# Altium PCB as5311_tsb.PcbDoc
Units mm, origin at the board's own origin, x right, y up, seen from the top; angles counter-clockwise.
Board outline 12 x 16 mm, 2 copper layers (Top Layer, Bottom Layer), stack 1.569 mm thick; 6 components, 12 nets, 45 pads, 24 vias.
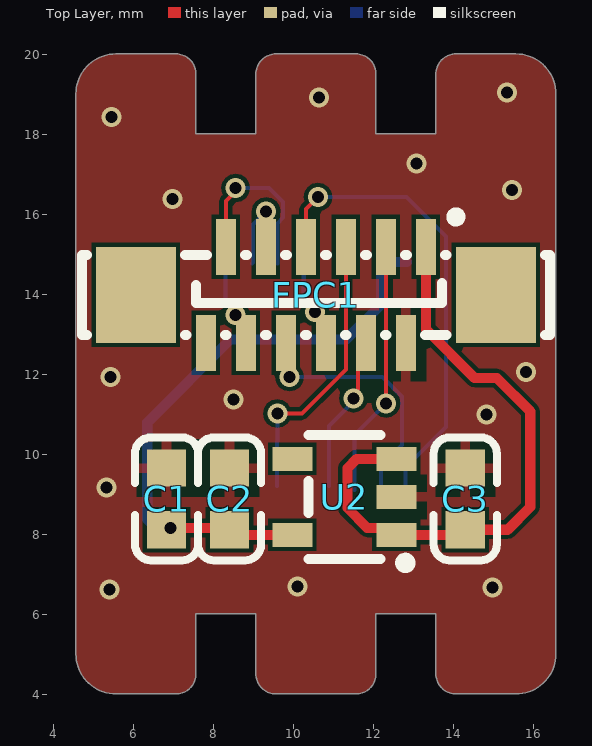
[diagram p0: Top Layer view]
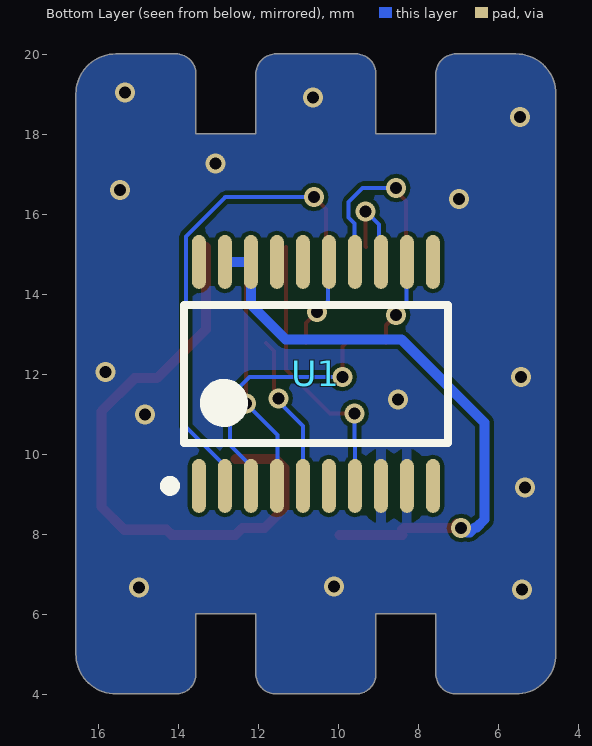
[diagram p1: Bottom Layer view, seen from below]
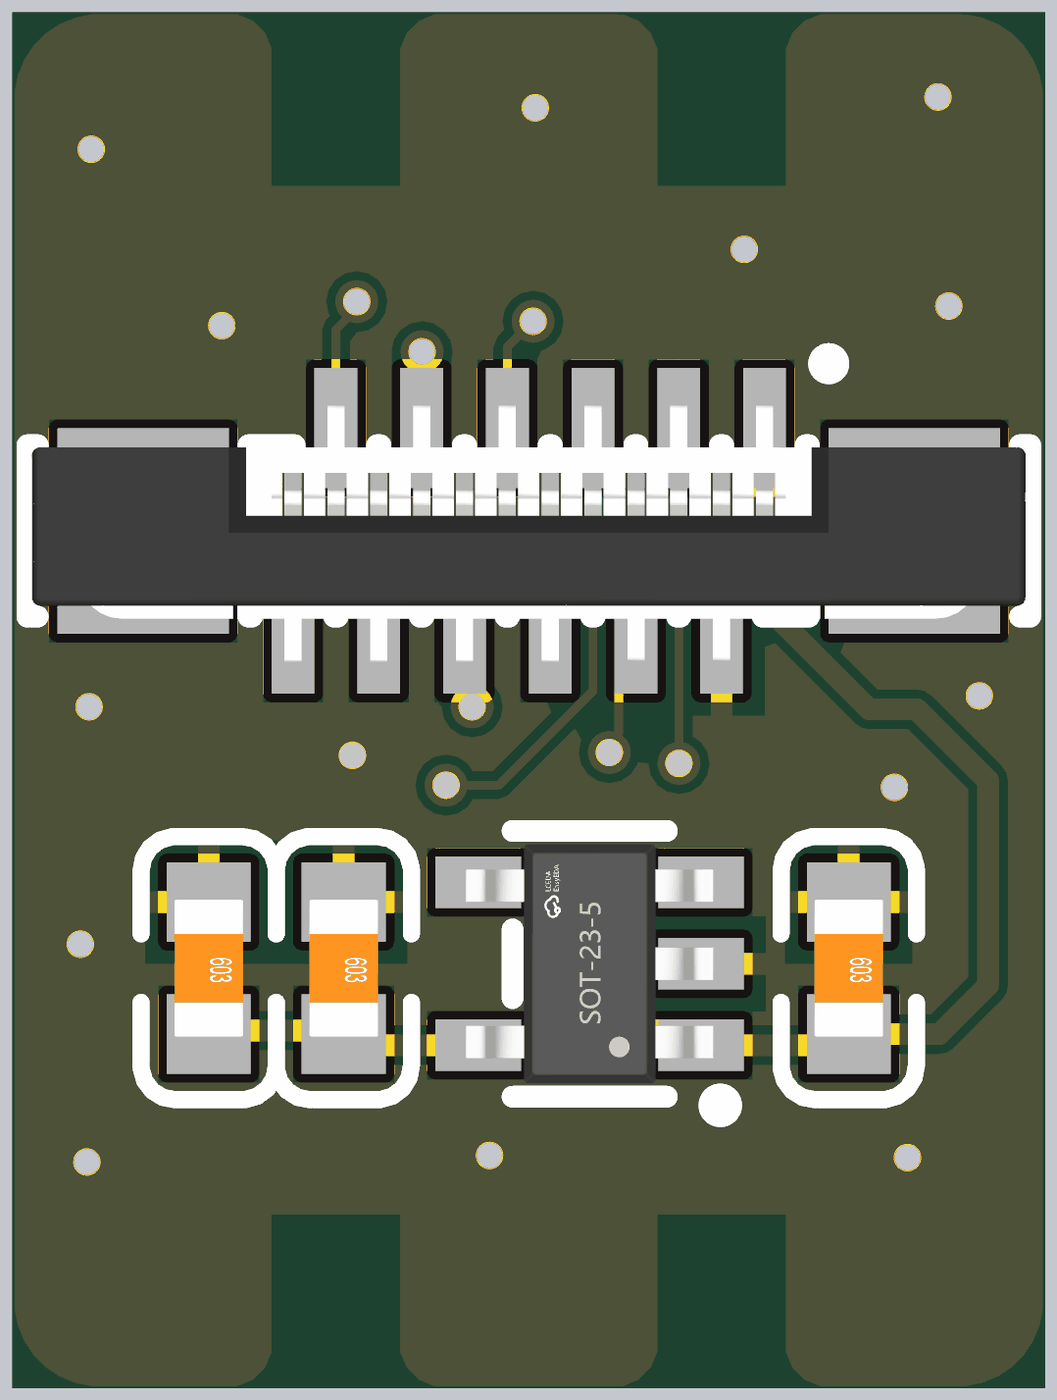
[diagram p2: 3D render of the assembled board from above, using the file's embedded part models]

## Layer stack, top to bottom
Top Solder: solder mask 0.0254, SM-001, Dk 4
Top Layer: signal copper 0.035
Dielectric 1: core 1.4986, Core-043, Dk 4.3
Bottom Layer: signal copper 0.035
Bottom Solder: solder mask 0.0254, SM-001, Dk 4

## Board outline
5.566,4.014 7.066,4.014 ccw(c7.066,4.514) 7.566,4.514 7.566,6.014 9.066,6.014 9.066,4.514 ccw(c9.566,4.514) 9.566,4.014 11.566,4.014 ccw(c11.566,4.514) 12.066,4.514 12.066,6.014 13.566,6.014 13.566,4.514 ccw(c14.066,4.514) 14.066,4.014 15.566,4.014 ccw(c15.566,5.014) 16.566,5.014 16.566,19.014 ccw(c15.566,19.014) 15.566,20.014 14.066,20.014 ccw(c14.066,19.514) 13.566,19.514 13.566,18.014 12.066,18.014 12.066,19.514 ccw(c11.566,19.514) 11.566,20.014 9.566,20.014 ccw(c9.566,19.514) 9.066,19.514 9.066,18.014 7.566,18.014 7.566,19.514 ccw(c7.066,19.514) 7.066,20.014 5.566,20.014 ccw(c5.566,19.014) 4.566,19.014 4.566,5.014 ccw(c5.566,5.014)

## Design rules (kind name [scope] priority, off if disabled: settings)
Clearance [All] p1: gap=0.1 ignorepadtopadclearanceinfootprint=TRUE
HoleSize [All] p1: absolutevalues=TRUE maxlimit=253.975 minlimit=0.025 maxpercent=80.000 minpercent=20.000
HoleToHoleClearance [All] p1 off: gap=0.254 allowstackedmicrovias=TRUE
MinimumSolderMaskSliver [All] p1 off: minsoldermaskwidth=0.254
PolygonConnect [All] p1: thpad.connectstyle=Direct thpad.reliefconductorwidth=0.254 thpad.reliefentries=4 thpad.polygonreliefangle="90 Angle" thpad.airgapwidth=0.254 smdpad.connectstyle=Relief smdpad.reliefconductorwidth=0.254 smdpad.reliefentries=4 smdpad.polygonreliefangle="90 Angle" smdpad.airgapwidth=0.254 via.connectstyle=Direct via.reliefconductorwidth=0.254 via.reliefentries=4 via.polygonreliefangle="90 Angle" via.airgapwidth=0.254
RoutingVias [All] p1: holewidth=0.3 width=0.5 viastyle="Through Hole" minholewidth=0.3 minwidth=0.5 maxholewidth=999 maxwidth=999
SilkToSilkClearance [All] p1 off: silktosilkclearance=0.254
SilkToSolderMaskClearance [IsPad] p1 off: minsilkscreentomaskgap=0.254 clearancetoexposedcopper=TRUE
SolderMaskExpansion [All] p1: expansion=0.102 istentingtop=FALSE
Width [All] p1: maxlimit=253.975 minlimit=0.102 preferedwidth=0.203
25 further rules are at their usual default settings.

## Components (designator, comment, footprint, x,y, rotation, side; value= is the part's Value field where it differs from the comment)
C1 "10uF (106) 10% 10V" 0603_C 6.833,8.89 r270 top
C2 "100nF (104) 10% 50V" 0603_C 8.407,8.89 r270 top
C3 "100nF (104) 10% 50V" 0603_C 14.3,8.89 r270 top
FPC1 "AFC11-S12ICA-00" CONN-SMD-12P_AFC11-S12ICA-00 10.567,13.989 r180 top
U1 "AS5311-ATST" AMS-TSSOP-20-6500X4400DE_A_L 10.566,12.014 r90 bottom
U2 "LP5907MFX-3.3/NOPB" SOT-23-5_L3.0-W1.7-P0.95-LS2.8-BR 11.278,8.941 r0 top

## Footprints (in the part's own frame and the unit in brackets; to place one, negate y for a bottom-side part, rotate by r counter-clockwise, add the part's x,y. Pads: shape width x height; smd on the part's side, far side on the other; paste and mask are expansions set on the pad)
0603_C [mm]
  rect 0.93x0.98 smd: 1(-0.77,0) 2(0.77,0)
  silkscreen extent -1.53,-0.79 1.54,0.79, body extent -0.8,-0.4 0.8,0.4, height 0.3
AMS-TSSOP-20-6500X4400DE_A_L [mm] "SOP, 20-Leads, Body 6.5x4.4mm, Pitch 0.65mm, IPC High Density"
  oval 1.35x0.35 smd: 1(-2.8,2.925) 2(-2.8,2.275) 3(-2.8,1.625) 4(-2.8,0.975) 5(-2.8,0.325) 6(-2.8,-0.325) 7(-2.8,-0.975) 8(-2.8,-1.625) 9(-2.8,-2.275) 10(-2.8,-2.925) 11(2.8,-2.925) 12(2.8,-2.275) 13(2.8,-1.625) 14(2.8,-0.975) 15(2.8,-0.325) 16(2.8,0.325) 17(2.8,0.975) 18(2.8,1.625) 19(2.8,2.275) 20(2.8,2.925)
  silkscreen extent -2.92,-3.3 1.73,3.78, body extent -3.2,-3.3 3.2,3.3, height 1.2
CONN-SMD-12P_AFC11-S12ICA-00 [mm]
  rect 0.5x1.4 smd: 1(-2.75,-1.2) 2(-2.25,1.2) 3(-1.75,-1.2) 4(-1.25,1.2) 5(-0.75,-1.2) 6(-0.25,1.2) 7(0.25,-1.2) 8(0.75,1.2) 9(1.25,-1.2) 10(1.75,1.2) 11(2.25,-1.2) 12(2.75,1.2)
  rect 2x2.4 smd: 13(4.5,0) 14(-4.5,0)
  silkscreen extent -5.85,-2.07 5.85,1, body extent -5.8,-1.48 5.8,1.52, height 4.4
SOT-23-5_L3.0-W1.7-P0.95-LS2.8-BR [mm]
  rect 1x0.6 smd: 1(1.3,-0.95) 2(1.3,0) 3(1.3,0.95) 4(-1.3,0.95) 5(-1.3,-0.95)
  silkscreen extent -0.9,-1.78 1.65,1.55, body extent -1.45,-1.39 1.45,1.39, height 1.2

## Part data
C1: library part "0603 10uF (106) 10% 10V", "贴片电容", Package=0603, SuppliersPartNumber=C19702, ComponentLink1Description=供应商链接, ComponentLink1URL=http://www.szlcsc.com/product/details_20411.html, Supplier=LC
C2 C3: library part "0603 100nF (104) 10% 50V", "贴片电容", Package=0603, SuppliersPartNumber=C14663, ComponentLink1Description=供应商链接, ComponentLink1URL=http://www.szlcsc.com/product/details_15331.html, Supplier=LC
FPC1: library part FPC-12PIN-0.5-立贴, "AFC11-S12ICA-00，间距:0.5mm;触点数量:12P;锁定特性:抽屉式;触点类型:单侧触点/垂直;安装类型:立贴;", JLCPCB Part Class=扩展库, LCSC Part Name="间距:0.5mm P数:12P 抽屉式 单侧触点/垂直 正脚", Manufacturer=JS(钜硕电子), Add into BOM=yes, Contact Type=单侧触点/垂直, Convert to PCB=yes, Datasheet=https://atta.szlcsc.com/upload/public/pdf/source/20191211/C466537_F6F2472ADACFFA77E875AFE9DAB8E0AD.pdf, Device=AFC11-S12ICA-00, FFC, FCB Thickness=0.3mm, Height Above Board=4.4mm, Locking Feature=抽屉式, Manufacturer Part=AFC11-S12ICA-00, Mounting Type=立贴, Name=AFC11-S12ICA-00, Number of Contacts=12P, Pitch=0.5mm, Supplier=LCSC, Supplier Footprint=SMD,P=0.5mm, Supplier Part=C262499, Symbol=AFC11-S12ICA-00
U1: library part AS5311, "12-bit Linear Incremental Position Sensor with Digital Interface, 3.3 or 5 V, TSSOP-20, Pb-Free, Reel", Manufacturer=AMS, Supply Voltage (V)="3.3 or 5.0", ComponentLink1Description="Manufacturer URL", ComponentLink1URL=www.ams.com, ComponentLink2Description=Datasheet, ComponentLink2URL=http://www.ams.com/eng/content/download/17954/325059/15366, DatasheetVersion="Rev. 1.12", Features="high resolution, linear movement measurement using multi-pole magnetic strips, circular off-axis movement measurement using multi-pole magnetic rings", Manufacturer Part Number=AS5311-ATST, Mounting Technology="Surface Mount", Output="incremental A & B with index; absolute serial + PWM output", PackageDescription="20-Pin Thin Shrink Small Outline Package, 6.5 x 4.4 mm Body, 0.65 mm Pitch", PackageReference=TSSOP-20, PackageVersion="Rev. 1.9, 11/2012", PartNumber=AS5311-ATST, Resolution="0.488 Âµm absolute 1.95 Âµm incremental"
U2: "输出类型:固定;输出极性:正;最大输入电压:5.5V;输出电压:3.3V;输出电流:250mA;电源纹波抑制比(PSRR):90dB;", Dropout Voltage=250mV@(250mA), JLCPCB Part Class=扩展库, LCSC Part Name="输入5.5V 输出3.3V 250mA", Manufacturer=TI(德州仪器), Maximum Input Voltage=5.5V, Operating Temperature=-40℃~+125℃, Output Current=250mA, Output Voltage=3.3V, Power Supply Rejection Ratio (PSRR)=90dB, Quiescent Current (Ground Current)=25uA, Add into BOM=yes, Convert to PCB=yes, Datasheet=https://www.ti.com/cn/lit/gpn/lp5907, Device=LP5907MFX-3.3/NOPB, Manufacturer Part=LP5907MFX-3.3/NOPB, Name=LP5907MFX-3.3/NOPB, Number of Outputs=1, Output Polarity=正, Output Type=固定, Supplier=LCSC, Supplier Footprint=SOT-23-5, Supplier Part=C80670, Symbol=LP5907MFX-3.3/NOPB

## Via types
v1: diameter 0.5, hole 0.3, Top Layer to Bottom Layer, tented both sides, 24 vias

## Nets (pads, with @x,y where several pads share a name; then routed paths per layer and width w, separated by ;. In a path a pad name is that pad's centre, name@x,y a point inside that pad or via, vN(x,y) a via of type N, cw(c..) or ccw(c..) an arc to the next point about the centre after c; other vN are vias at no path point)
3.3V: C1.2 C2.2 U1.18 U1.19 U2.5 | length 15
  Top Layer w0.254: C1.2@7.051,8.278 v1(6.934,8.161) 8.366,8.161 C2.2 ; C2.2@8.407,7.991 U2.5
  Bottom Layer w0.254: v1@6.782,8.052 6.715,8.052 6.588,8.179 6.547,8.179 6.35,8.376 6.35,10.795 8.433,12.878 11.328,12.878 12.191,13.741 U1.18 U1.19
5V: C3.2 FPC1.1 U2.1 U2.3 | length 15.4
  Top Layer w0.254: U2.3 11.589,9.891 11.354,9.656 11.354,8.661 11.851,8.164 12.405,8.164 U2.1 14.171,7.991 C3.2 15.359,8.12 15.926,8.687 15.926,11.078 15.095,11.908 14.539,11.908 13.316,13.131 FPC1.1
A: FPC1.3 U1.4 | length 6.4
  Top Layer w0.102: FPC1.3 12.319,15.187 v1(12.319,11.278)
  Bottom Layer w0.102: U1.4@11.532,9.113 11.532,10.49 v1(12.319,11.278)
B: FPC1.4 U1.5 | length 4
  Top Layer w0.102: v1(11.506,11.405) 11.506,11.512 11.617,11.623 11.617,12.59 FPC1.4
  Bottom Layer w0.102: U1.5 10.891,10.714 11.506,11.328 v1(11.506,11.405)
CLK: FPC1.9 U1.13 | length 2.3
  Top Layer w0.102: FPC1.9 9.322,15.195 v1(9.322,16.078)
  Bottom Layer w0.102: U1.13@8.966,14.774 8.989,14.797 8.989,15.745 v1(9.322,16.078)
CSN: FPC1.11 U1.14 | length 4.5
  Top Layer w0.102: FPC1.11 8.316,16.337 8.56,16.58 v1(8.56,16.662)
  Bottom Layer w0.102: v1(8.56,16.662) 9.398,16.662 9.748,16.312 9.748,15.926 9.601,15.779 U1.14@9.601,14.775
DO: FPC1.10 U1.12 | length 2.2
  Top Layer w0.102: v1(8.56,13.487) 8.816,13.231 FPC1.10
  Bottom Layer w0.102: U1.12@8.306,14.812 8.306,13.783 8.56,13.529 v1(8.56,13.487)
GND: C1.1 C2.1 C3.1 FPC1.2 U1.8 U1.9 U2.2
  other v1: 5.41,6.629 14.986,6.68 10.109,6.706 5.334,9.169 14.834,10.998 8.509,11.371 5.436,11.938 15.824,12.065 6.985,16.383 15.469,16.612 13.081,17.272 5.461,18.44 10.643,18.923 15.342,19.05
MagDECn: FPC1.8 U1.3 | length 6.4
  Top Layer w0.102: FPC1.8 9.906,12.7 v1(9.906,11.938)
  Bottom Layer w0.102: v1(9.906,11.938) 12.225,11.938 12.72,11.444 12.72,10.243 12.191,9.714 U1.3
MagINCn: FPC1.7 U1.2 | length 11.7
  Top Layer w0.102: FPC1.7 10.316,16.133 v1(10.617,16.434)
  Bottom Layer w0.102: v1(10.617,16.434) 12.833,16.434 13.817,15.449 13.817,10.69 12.802,9.674 U1.2@12.802,9.194
PWM: FPC1.6 U1.15 | length 2.3
  Top Layer w0.102: v1(10.541,13.564) 10.817,13.288 FPC1.6
  Bottom Layer w0.102: U1.15 10.262,14.794 10.262,13.831 10.529,13.564 v1(10.541,13.564)
Z: FPC1.5 U1.7 | length 7
  Top Layer w0.102: v1(9.601,11.024) 10.214,11.024 11.316,12.126 FPC1.5
  Bottom Layer w0.102: U1.7 9.591,10.329 9.601,10.339 v1(9.601,11.024)
pads on no net: FPC1.12 FPC1.13 FPC1.14 U1.1 U1.6 U1.10 U1.11 U1.16 U1.17 U1.20 U2.4

## Polygon pours and split planes (outlines as drawn)
GND on Bottom Layer "GND_L02_P001" (solid, pour order 1): 5.566,4.014 7.066,4.014 ccw(c7.066,4.514) 7.566,4.514 7.566,6.014 9.066,6.014 9.066,4.514 ccw(c9.566,4.514) 9.566,4.014 11.566,4.014 ccw(c11.566,4.514) 12.066,4.514 12.066,6.014 13.566,6.014 13.566,4.514 ccw(c14.066,4.514) 14.066,4.014 15.566,4.014 ccw(c15.566,5.014) 16.566,5.014 16.566,19.014 ccw(c15.566,19.014) 15.566,20.014 14.066,20.014 ccw(c14.066,19.514) 13.566,19.514 13.566,18.014 12.066,18.014 12.066,19.514 ccw(c11.566,19.514) 11.566,20.014 9.566,20.014 ccw(c9.566,19.514) 9.066,19.514 9.066,18.014 7.566,18.014 7.566,19.514 ccw(c7.066,19.514) 7.066,20.014 5.566,20.014 ccw(c5.566,19.014) 4.566,19.014 4.566,5.014 ccw(c5.566,5.014)
GND on Top Layer "GND_L01_P000" (solid, pour order 0): 5.566,4.014 7.066,4.014 ccw(c7.066,4.514) 7.566,4.514 7.566,6.014 9.066,6.014 9.066,4.514 ccw(c9.566,4.514) 9.566,4.014 11.566,4.014 ccw(c11.566,4.514) 12.066,4.514 12.066,6.014 13.566,6.014 13.566,4.514 ccw(c14.066,4.514) 14.066,4.014 15.566,4.014 ccw(c15.566,5.014) 16.566,5.014 16.566,19.014 ccw(c15.566,19.014) 15.566,20.014 14.066,20.014 ccw(c14.066,19.514) 13.566,19.514 13.566,18.014 12.066,18.014 12.066,19.514 ccw(c11.566,19.514) 11.566,20.014 9.566,20.014 ccw(c9.566,19.514) 9.066,19.514 9.066,18.014 7.566,18.014 7.566,19.514 ccw(c7.066,19.514) 7.066,20.014 5.566,20.014 ccw(c5.566,19.014) 4.566,19.014 4.566,5.014 ccw(c5.566,5.014)

## Silkscreen, mask and mechanical layers (free items; w line width, h text height)
Mechanical 1:
  the board outline again, w0.1
Mechanical 15:
  lines w0.025: 2.692,7.01 17.475,7.01 ; 5.817,-1.753 5.817,13.03 ; 7.716,12.438 7.916,12.939 ; 7.716,12.939 7.916,12.438 ; 8.216,14.939 8.416,15.439 ; 8.216,15.439 8.416,14.939 ; 15.316,-3.002 15.316,11.781
  lines w0.1: 7.266,9.764 13.866,14.264 ; 7.266,9.764 7.266,14.264 ; 7.266,9.764 13.866,9.764 ; 7.266,14.264 13.866,14.264 ; 7.266,14.264 13.866,9.764 ; 13.866,9.764 13.866,14.264